# Altium PCB LPRAN.PcbDoc (part 1 of 3)
Units mil, origin at the board's own origin, x right, y up, seen from the top; angles counter-clockwise.
Board outline 3200 x 1800 mil, 4 copper layers (Component Side, Ground Plane, Power Plane, Solder Side), stack 58 mil thick; 140 components, 132 nets, 550 pads, 376 vias.
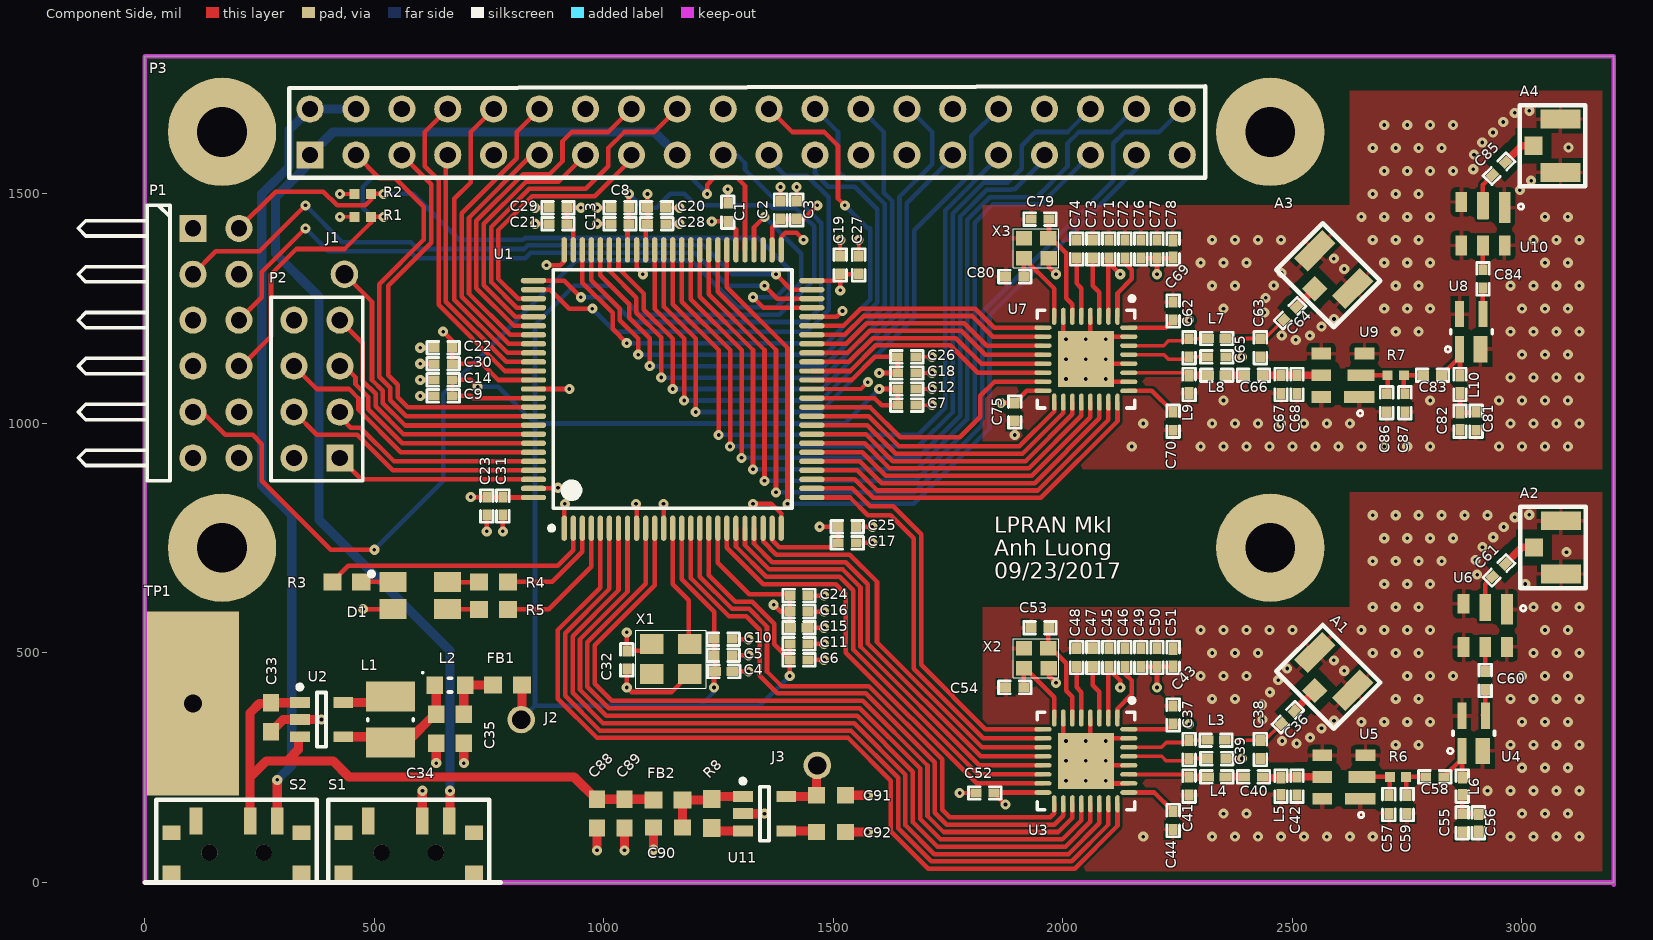
[diagram p0: Component Side view]
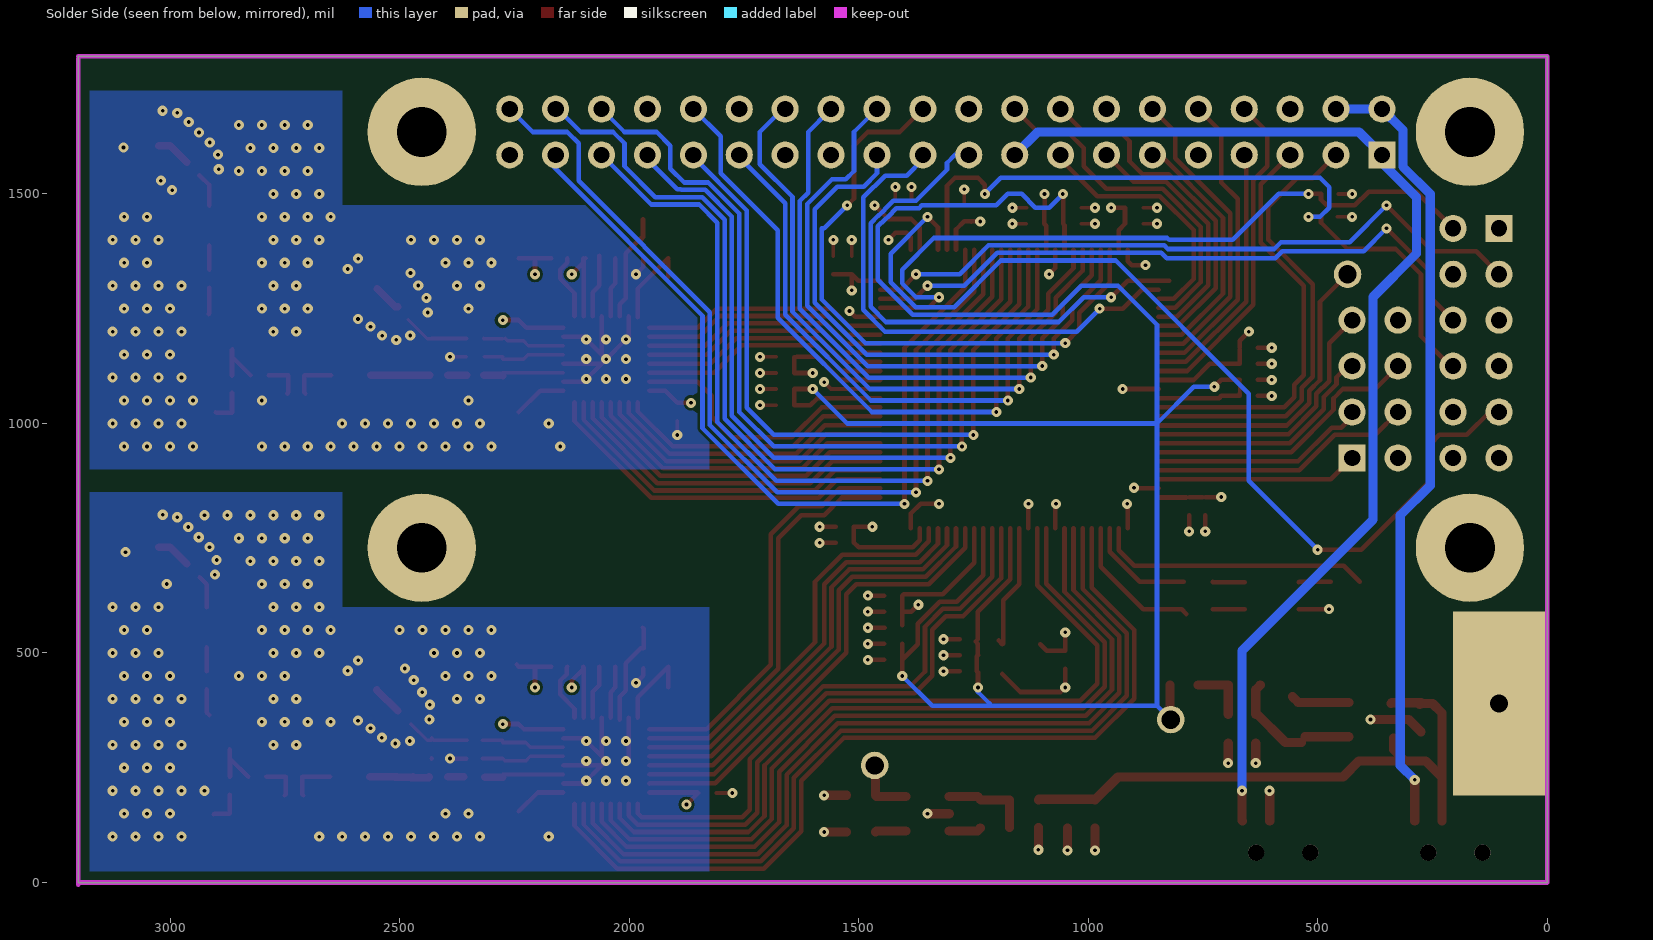
[diagram p1: Solder Side view, seen from below]
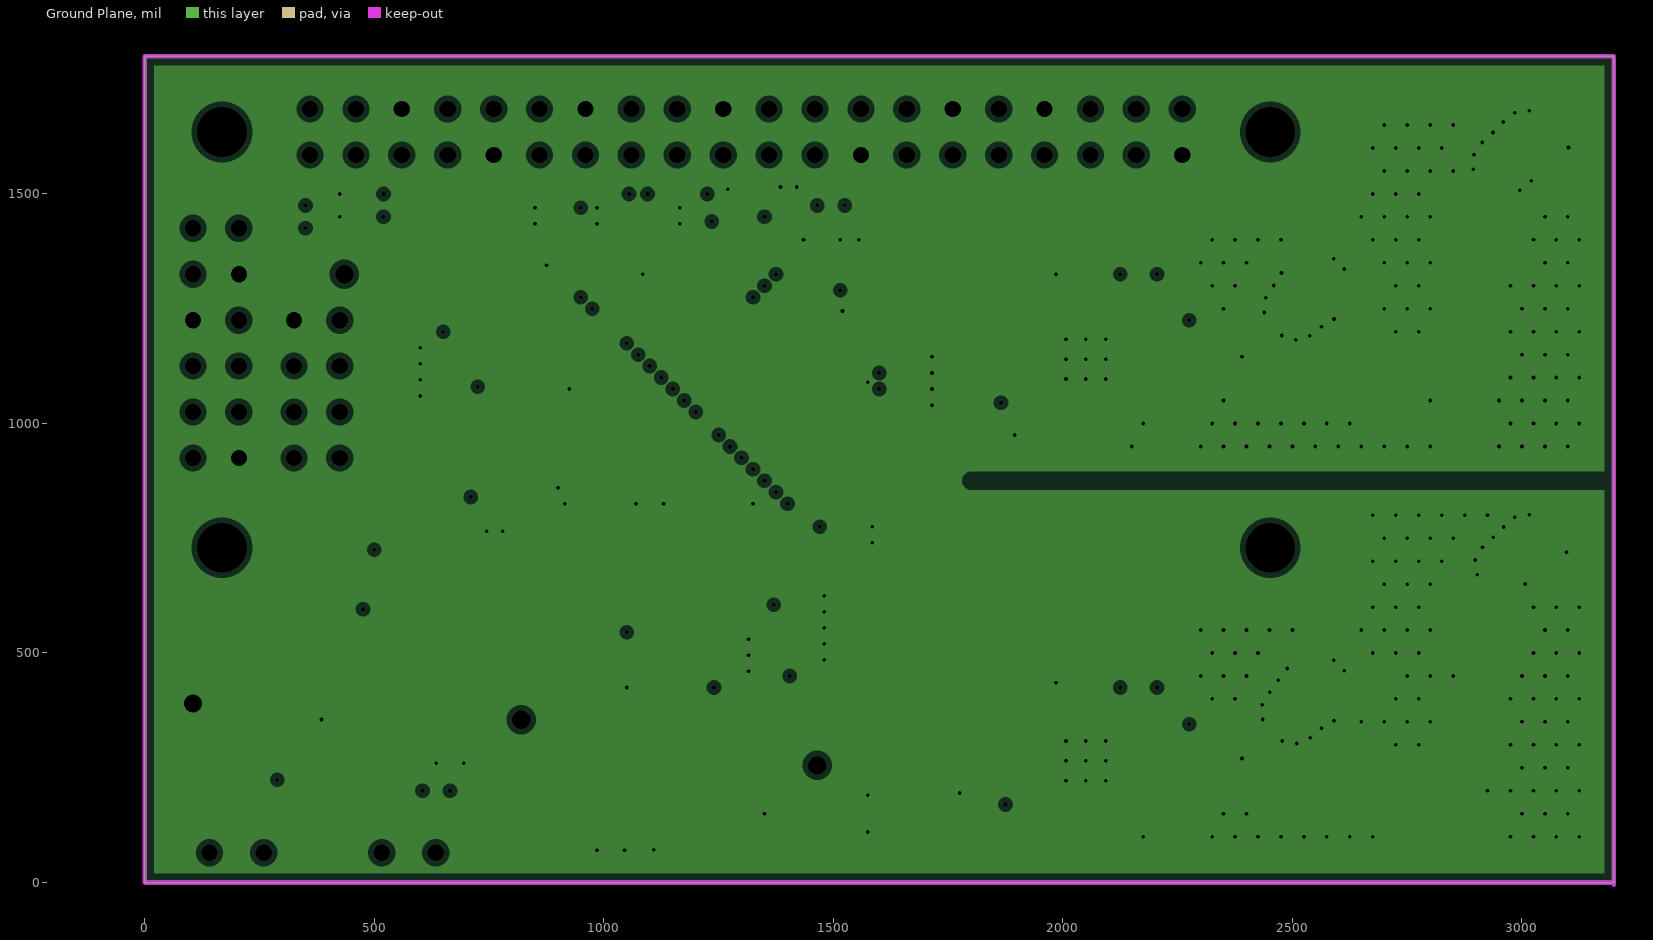
[diagram p2: Ground Plane, clearances drawn from the general rule]
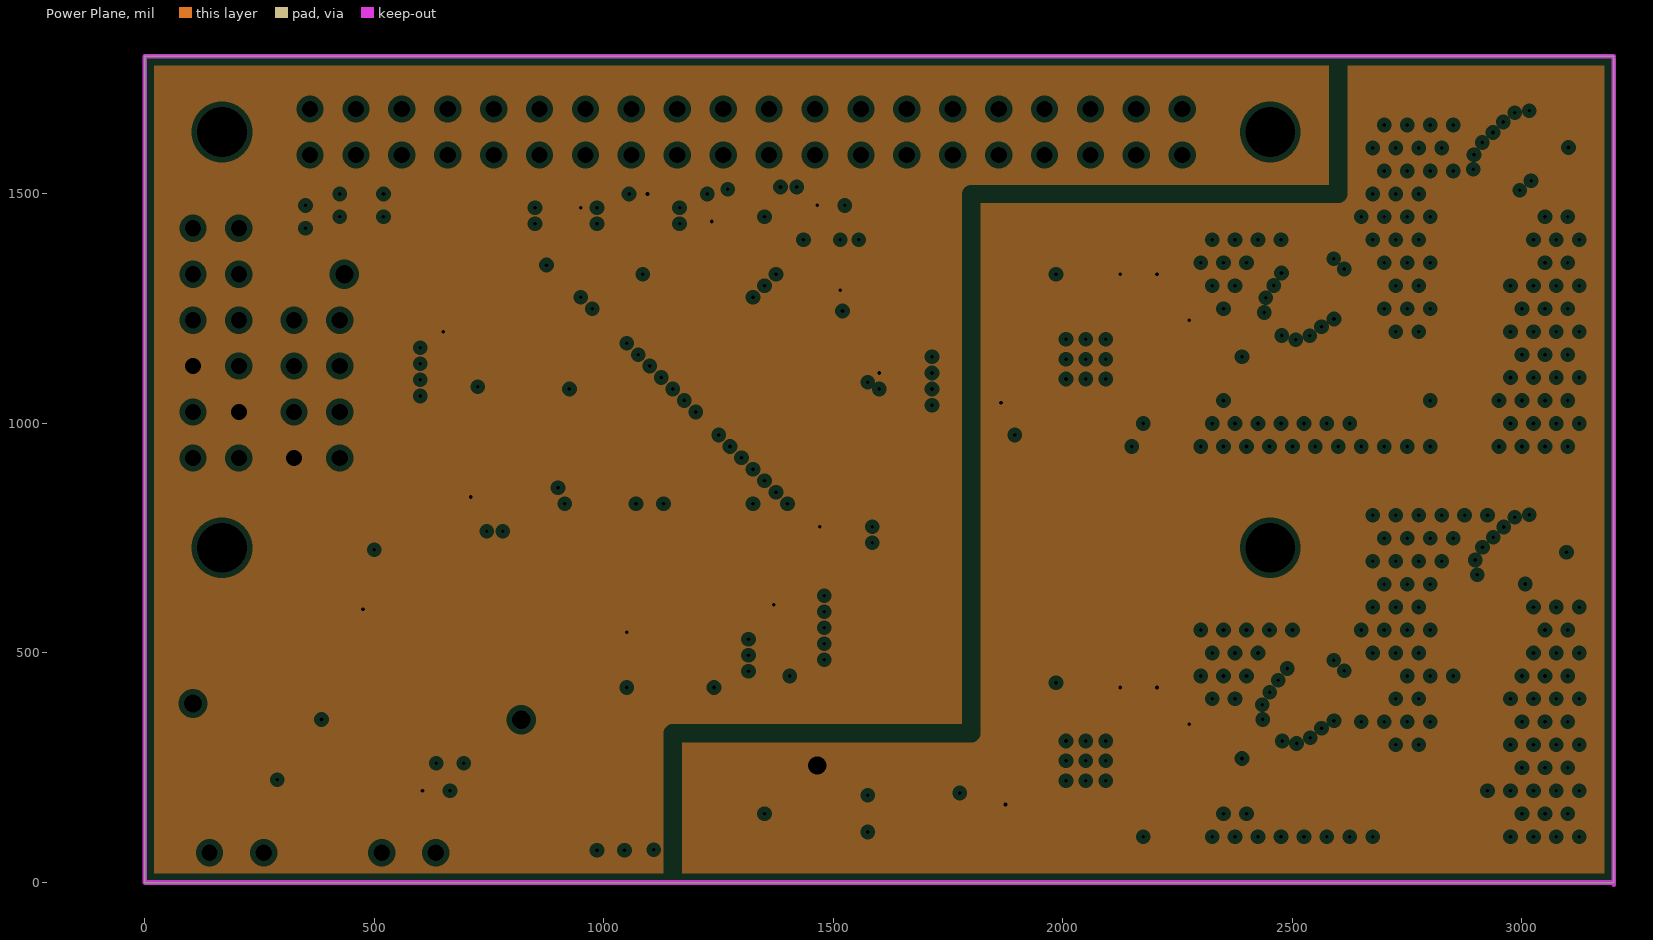
[diagram p3: Power Plane, clearances drawn from the general rule]
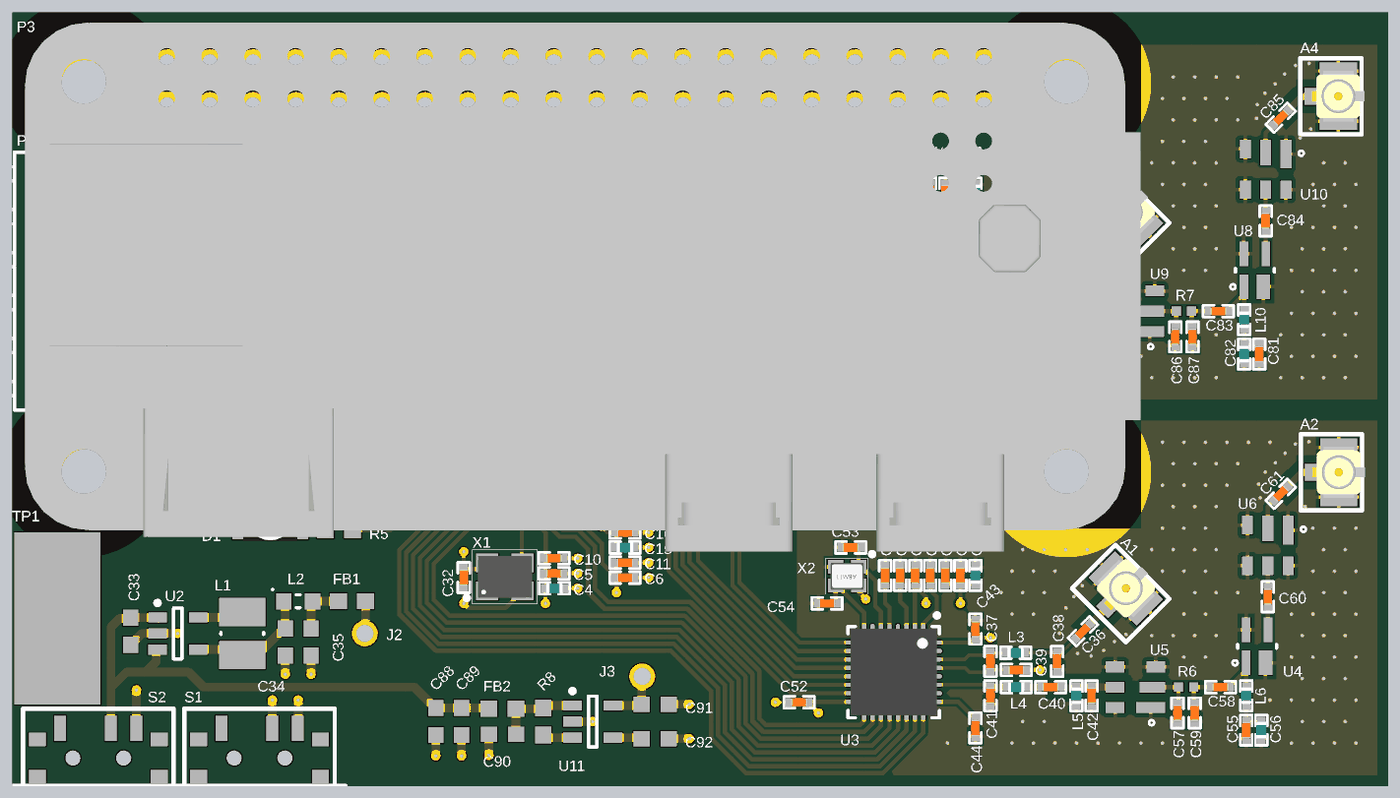
[diagram p5: 3D render of the assembled board from above, using the file's embedded part models]

## Layer stack, top to bottom
Top Solder: solder mask 0.4, Solder Resist, Dk 3.5
Component Side: signal copper 1.7
Dielectric 1: core 11.9, FR-4, Dk 4.5
Ground Plane: plane copper 1.4, net GND
Dielectric 3: prepreg 28, Core, Dk 4.5
Power Plane: plane copper 1.4, net VCC
Dielectric 4: core 11.9, FR-4, Dk 4.5
Solder Side: signal copper 1.7
Bottom Solder: solder mask 0.4, Solder Resist, Dk 3.5

## Board outline
0,0 3200,0 3200,1800 0,1800

## Design rules (kind name [scope] priority, off if disabled: settings)
Clearance [InNetClass('RF')] p1: gap=20 ignorepadtopadclearanceinfootprint=FALSE
Clearance "Clearance~Sunstone Circuits" [All] p2: gap=6 ignorepadtopadclearanceinfootprint=FALSE except(0: Arc-Hole Track-Hole SMDPad-Hole THPad-Hole Via-Hole Fill-Hole Poly-Hole Region-Hole Text-Hole) // Sunstone Circuits Minimum Clearance Rule (MLB~4&6 Layer Designs)
HoleSize "HoleSize~Sunstone Circuits" [All] p1: absolutevalues=TRUE maxlimit=251 minlimit=8 maxpercent=80.000 minpercent=20.000 // Sunstone Circuits Hole Size Rule (MLB~4&6 Layer Designs)
HoleSize Testpoint [All] p2: absolutevalues=TRUE maxlimit=100 minlimit=1 maxpercent=80.000 minpercent=20.000
HoleSize TestPointUsage [All] p3: absolutevalues=TRUE maxlimit=100 minlimit=1 maxpercent=80.000 minpercent=20.000
MinimumAnnularRing "MinimumAnnularRing~Sunstone Circuits" [All] p1: minimumring=7 // Sunstone Circuits Minimum Annular Ring (MLB~4&6 Layer Designs)
PlaneClearance "PlaneClearance~Sunstone Circuits" [All] p1: clearance=12 // Sunstone Circuits Power Plane Clearance Rule (MLB~4&6 Layer Designs)
PlaneConnect "PlaneConnect~Sunstone Circuits" [All] p1: planeconnectstyle=Relief reliefexpansion=10 reliefentries=4 reliefconductorwidth=8 reliefairgap=10 // Sunstone Circuits Power Plane Connect Rule (MLB~4&6 Layer Designs)
PolygonConnect [IsVia] p1: thpad.connectstyle=Direct thpad.reliefconductorwidth=10 thpad.reliefentries=4 thpad.polygonreliefangle="90 Angle" thpad.airgapwidth=10 smdpad.connectstyle=Relief smdpad.reliefconductorwidth=10 smdpad.reliefentries=4 smdpad.polygonreliefangle="90 Angle" smdpad.airgapwidth=10 via.connectstyle=Direct via.reliefconductorwidth=10 via.reliefentries=4 via.polygonreliefangle="90 Angle" via.airgapwidth=10
PolygonConnect "PolygonConnect~Sunstone Circuits" [All] p2: connectstyle=Relief reliefconductorwidth=8 reliefentries=4 polygonreliefangle="90 Angle" airgapwidth=10 // Sunstone Circuits Polygon Connect Style (MLB~4&6 Layer Designs)
RoomDefinition U_SX1257 [InComponentClass('U_SX1257')] p1: confinementstyle=ConfineIn formatcopy=TRUE lockcomponents=FALSE outline -2000,-3000 0,-3000 0,-2000 -2000,-2000
RoomDefinition U_SX1255 [InComponentClass('U_SX1255')] p2: confinementstyle=ConfineIn formatcopy=TRUE lockcomponents=FALSE outline -2000,-3000 0,-3000 0,-2000 -2000,-2000
RoomDefinition U_FPGA [InComponentClass('U_FPGA')] p3: confinementstyle=ConfineIn formatcopy=TRUE lockcomponents=FALSE outline -2000,-3000 0,-3000 0,-2000 -2000,-2000
RoomDefinition LPRAN [InComponentClass('LPRAN')] p4: confinementstyle=ConfineIn formatcopy=TRUE lockcomponents=FALSE outline -2000,-3000 0,-3000 0,-2000 -2000,-2000
RoutingVias "RoutingVias~Sunstone Circuits" [All] p1: holewidth=16 width=30 viastyle="Through Hole" minholewidth=8 minwidth=22 maxholewidth=20 maxwidth=40 // Sunstone Circuits Routing Vias Rule (MLB~4&6 Layer Designs)
ShortCircuit "ShortCircuit~Sunstone Circuits" [All] p1: allowed=FALSE // Sunstone Circuits Short Circuit Rule~Do Not Allow (MLB~4&6 Layer Designs)
SolderMaskExpansion "SolderMaskExpansion~Sunstone Circuits" [All] p1: expansion=3 // Sunstone Circuits Solder Mask Expansion Rule (MLB~4&6 Layer Designs)
ViasUnderSMD "ViasUnderSMD~Sunstone Circuits" [All] p1: allowed=FALSE // Sunstone Circuits Vias Under SMD~Do Not Allow (MLB~4&6 Layer Designs)
Width [InNetClass('RF')] p1: maxlimit=16.4 minlimit=16.4 preferedwidth=16.4 impedancedriven=TRUE minimp=50.000000 maximp=50.000000 favimp=50.000000
Width "Width~Sunstone Circuits" [All] p2: maxlimit=100 minlimit=6 preferedwidth=10 // Sunstone Circuits Minimum Width Rule (MLB~4&6 Layer Designs)
26 further rules are at their usual default settings.

## Classes and differential pairs
component class LPRAN: C32 C33 C34 C35 D1 FB1 J1 J2 L1 L2 P2 P3 R3 R4 R5 S1 S2 TP1 U2 X1
component class U_FPGA: C1 C2 C3 C4 C5 C6 C7 C8 C9 C10 C11 C12 C13 C14 C15 C16 C17 C18 C19 C20 C21 C22 C23 C24 C25 C26 C27 C28 C29 C30 C31 P1 R1 R2 U1
component class U_SX1255: A3 A4 C62 C63 C64 C65 C66 C67 C68 C69 C70 C71 C72 C73 C74 C75 C76 C77 C78 C79 C80 C81 C82 C83 C84 C85 C86 C87 C88 C89 C90 C91 C92 FB2 J3 L7 L8 L9 L10 R7 R8 U7 U8 U9 U10 U11 X3
component class U_SX1257: A1 A2 C36 C37 C38 C39 C40 C41 C42 C43 C44 C45 C46 C47 C48 C49 C50 C51 C52 C53 C54 C55 C56 C57 C58 C59 C60 C61 L3 L4 L5 L6 R6 U3 U4 U5 U6 X2
net class RF: HF_RX LF_RX NetA1_1 NetA2_1 NetA3_1 NetA4_1

## Components (designator, comment, footprint, x,y, rotation, side; value= is the part's Value field where it differs from the comment)
A1 "U.FL-R-SMT(01)" U.FL-R-SMT-1 2590,460 r315 top
A2 "U.FL-R-SMT(01)" U.FL-R-SMT-1 3085,730 r270 top
A3 "U.FL-R-SMT(01)" U.FL-R-SMT-1 2590,1335 r315 top
A4 "U.FL-R-SMT(01)" U.FL-R-SMT-1 3084.06,1605 r270 top
C1 "GRM155R71C104KA88D" CAPC1005X04L 1270,1460 r270 top
C2 "GRM155R71E103KA01D" CAPC1005X04L 1385,1465 r270 top
C3 "GRM155R71C104KA88D" CAPC1005X04L 1420,1465 r270 top
C4 "GRM155R60J106ME15D" INDC1005X04L 1260.98,460 r180 top
C5 "GRM155R71C104KA88D" CAPC1005X04L 1260,495 r180 top
C6 "GRM155R71C104KA88D" CAPC1005X04L 1425,485 r180 top
C7 "GRM155R71C104KA88D" CAPC1005X04L 1660,1040 r180 top
C8 "GRM155R71C104KA88D" CAPC1005X04L 1035,1470 r0 top
C9 "GRM155R71C104KA88D" CAPC1005X04L 650,1060 r0 top
C10 "GRM155R71E103KA01D" CAPC1005X04L 1260,530 r180 top
C11 "GRM155R71E103KA01D" CAPC1005X04L 1425,520 r180 top
C12 "GRM155R71E103KA01D" CAPC1005X04L 1660,1075 r180 top
C13 "GRM155R71E103KA01D" CAPC1005X04L 1035,1435 r0 top
C14 "GRM155R71E103KA01D" CAPC1005X04L 650,1095 r0 top
C15 "GRM155R60J106ME15D" INDC1005X04L 1425,555 r180 top
C16 "GRM155R71C104KA88D" CAPC1005X04L 1425,590 r180 top
C17 "GRM155R71C104KA88D" CAPC1005X04L 1530,740 r180 top
C18 "GRM155R71C104KA88D" CAPC1005X04L 1660,1110 r180 top
C19 "GRM155R71C104KA88D" CAPC1005X04L 1515,1345 r270 top
C20 "GRM155R71C104KA88D" CAPC1005X04L 1114.69,1470 r180 top
C21 "GRM155R71C104KA88D" CAPC1005X04L 900,1435 r0 top
C22 "GRM155R71C104KA88D" CAPC1005X04L 650,1165 r0 top
C23 "GRM155R71C104KA88D" CAPC1005X04L 745,820 r90 top
C24 "GRM155R71E103KA01D" CAPC1005X04L 1425,625 r180 top
C25 "GRM155R71E103KA01D" CAPC1005X04L 1530,775 r180 top
C26 "GRM155R71E103KA01D" CAPC1005X04L 1659.69,1145 r180 top
C27 "GRM155R71E103KA01D" CAPC1005X04L 1555,1345 r270 top
C28 "GRM155R71E103KA01D" CAPC1005X04L 1115,1435 r180 top
C29 "GRM155R71E103KA01D" CAPC1005X04L 900,1470 r0 top
C30 "GRM155R71E103KA01D" CAPC1005X04L 650.31,1130 r0 top
C31 "GRM155R71E103KA01D" CAPC1005X04L 780,820 r90 top
C32 "GRM155R71E103KA01D" CAPC1005X04L 1050,485 r90 top
C33 "GRM188R60J475KE19D" "CAPC1608X08N (0603)" 275,360 r90 top
C34 "GRM188C81C106MA73D" "CAPC1608X08N (0603)" 635,335 r90 top
C35 "GRM188R71C334KA01D" "CAPC1608X08N (0603)" 695,335 r90 top
C36 "GRM1555C1H100FA01D" CAPC1005X04L 2490,360 r45 top
C37 "GRM1555C1H3R3CA01D" CAPC1005X04L 2275,290 r90 top
C38 "GRM1555C1H3R3CA01D" CAPC1005X04L 2430,290 r90 top
C39 "GRM1555C1H330JA01D" CAPC1005X04L 2335,270 r0 top
C40 "GRM1555C1H100FA01D" CAPC1005X04L 2415,230 r0 top
C41 "GRM1555C1H2R7BA01D" CAPC1005X04L 2275,210 r90 top
C42 "GRM1555C1H5R6CA01D" CAPC1005X04L 2510,210 r90 top
C43 "GRM155R60J105KE19D" CAPC1005X04L 2240,365 r270 top
C44 "GRM155R71C104KA88D" CAPC1005X04L 2240,135 r90 top
C45 "GRM155R60J105KE19D" CAPC1005X04L 2100,490 r270 top
C46 "GRM155R71E103KA01D" CAPC1005X04L 2135,490 r270 top
C47 "GRM155R71C104KA88D" CAPC1005X04L 2065,490 r270 top
C48 "GRM155R71C104KA88D" CAPC1005X04L 2030,490 r270 top
C49 "GRM155R71C104KA88D" CAPC1005X04L 2170,490 r270 top
C50 "GRM155R60J105KE19D" CAPC1005X04L 2205,490 r270 top
C51 "GRM155R60J106ME15D" INDC1005X04L 2240,490 r270 top
C52 "GRM155R60J105KE19D" CAPC1005X04L 1830,195 r0 top
C53 "GRM1555C1H8R2CA01D" CAPC1005X04L 1950,555 r0 top
C54 "GRM1555C1H8R2CA01D" CAPC1005X04L 1895,425 r0 top
C55 "GRM1555C1H560JA01D" CAPC1005X04L 2870,130 r90 top
C56 "GRM155R60J106ME15D" INDC1005X04L 2905,130 r90 top
C57 "C_DNP" CAPC1005X04L 2710,170 r90 top value=DNP
C58 "GRM1555C1H560JA01D" CAPC1005X04L 2810,230 r0 top
C59 "C_DNP" CAPC1005X04L 2750,170 r90 top value=DNP
C60 "GRM1555C1H560JA01D" CAPC1005X04L 2920,440.31 r90 top
C61 "GRM1555C1H560JA01D" CAPC1005X04L 2950,680 r45 top
C62 "C_DNP" CAPC1005X04L 2275,1165 r90 top value=DNP
C63 "C_DNP" CAPC1005X04L 2430,1165 r90 top value=DNP
C64 "GRM1555C1H330JA01D" CAPC1005X04L 2495,1240 r45 top
C65 "GRM1555C1H270JA01J" CAPC1005X04L 2335,1145 r0 top
C66 "C_TBD" CAPC1005X04L 2415,1105 r0 top value=TBD
C67 "C_DNP" CAPC1005X04L 2475,1085 r90 top value=DNP
C68 "C_DNP" CAPC1005X04L 2510,1085 r90 top value=DNP
C69 "GRM155R60J105KE19D" CAPC1005X04L 2240,1245 r270 top
C70 "GRM155R71C104KA88D" CAPC1005X04L 2240,1005 r90 top
C71 "GRM155R60J105KE19D" CAPC1005X04L 2100,1380 r270 top
C72 "GRM155R71E103KA01D" CAPC1005X04L 2135,1380 r270 top
C73 "GRM155R71C104KA88D" CAPC1005X04L 2065,1380 r270 top
C74 "GRM155R71C104KA88D" CAPC1005X04L 2030,1380 r270 top
C75 "GRM155R60J105KE19D" CAPC1005X04L 1895,1025 r90 top
C76 "GRM155R71C104KA88D" CAPC1005X04L 2170,1380 r270 top
C77 "GRM155R60J105KE19D" CAPC1005X04L 2205,1380 r270 top
C78 "GRM155R60J106ME15D" INDC1005X04L 2240,1380 r270 top
C79 "GRM1555C1H8R2CA01D" CAPC1005X04L 1950,1445 r0 top
C80 "GRM1555C1H8R2CA01D" CAPC1005X04L 1895,1320 r0 top
C81 "GRM1555C1H560JA01D" CAPC1005X04L 2900,1005 r90 top
C82 "GRM155R60J106ME15D" INDC1005X04L 2865,1005 r90 top
C83 "C_TBD" CAPC1005X04L 2805,1105 r0 top value=TBD
C84 "C_TBD" CAPC1005X04L 2915,1315 r90 top value=TBD
C85 "C_TBD" CAPC1005X04L 2950,1555 r45 top value=TBD
C86 "C_DNP" CAPC1005X04L 2705,1045 r90 top value=DNP
C87 "C_DNP" CAPC1005X04L 2745,1045 r90 top value=DNP
C88 "GRM188C81C106MA73D" "CAPC1608X08N (0603)" 985,150 r90 top
C89 "GRM188R61A105KA61D" "CAPC1608X08N (0603)" 1045,150 r90 top
C90 "GRM188R60J225KE19D" "CAPC1608X08N (0603)" 1140,120 r0 top
C91 "GRM188R61A105KA61D" "CAPC1608X08N (0603)" 1495,190 r180 top
C92 "GRM1885C1H102JA01D" "CAPC1608X08N (0603)" 1495,110 r180 top
D1 "CLV1A-FKB-CJ1M1F1BB7R4S3" "CREE LV1" 600,625 r0 top
FB1 "MMZ1608R300A" "RESC1608X06N (0603)" 790,430 r180 top
FB2 "BLM18BD221SN1D" "RESC1608X06N (0603)" 1140,180 r0 top
J1 "5004" TP 435,1325 r0 top
J2 "5004" TP 820,355 r0 top
J3 "5004" TP 1465,255 r0 top
L1 "LQH32CN2R2M33L" INDC3225X22N 535,355 r270 top
L2 "LQG18HNR10J00D" INDC1608X08N 665,430 r0 top
L3 "LQG15HS10NJ02D" INDC1005X04L 2333.7,310 r0 top
L4 "LQG15HS15NJ02D" INDC1005X04L 2335,230 r0 top
L5 "LQG15HN12NJ02D" INDC1005X04L 2475,210 r90 top
L6 "LQG15HSR10J02D" INDC1005X04L 2870,210 r270 top
L7 "L_TBD" INDC1005X04L 2335,1185 r0 top
L8 "LQG15HS39NJ02D" INDC1005X04L 2335,1105 r0 top
L9 "LQG15HS82NJ02D" INDC1005X04L 2275,1085 r90 top
L10 "LQG15HSR10J02D" INDC1005X04L 2865,1085 r270 top
P1 "Header 6X2H" HDR2X6H 105,1425 r270 top
P2 "Header 4X2" HDR2X4 425,925 r90 top
P3 "Raspbery Pi Zero Mate" "Raspberry Pi Zero" 1310,1635 r270 top locked
R1 "MCR01MRTF1001" RESC1005X04N 475,1450 r0 top
R2 "MCR01MRTF1001" RESC1005X04N 475,1500 r0 top
R3 "MCR03ERTJ331" "RESC1608X06N (0603)" 440,655 r0 top
R4 "MCR03ERTJ331" "RESC1608X06N (0603)" 760,655 r0 top
R5 "MCR03ERTJ331" "RESC1608X06N (0603)" 760,595 r0 top
R6 "PMR01ZZPJ000" RESC1005X04N 2730,230 r0 top
R7 "PMR01ZZPJ000" RESC1005X04N 2725,1105 r0 top
R8 "MCR03ERTF1002" "RESC1608X06N (0603)" 1235,150 r90 top value=10k
S1 "MA12R" MA12R/TR 575,65 r90 top
S2 "MA12R" MA12R/TR 200,65 r90 top
TP1 "CLIP_ON_TP" CLIP_ON_TP 105,390 r180 top
U1 "AGL250V2-VQ100" TSQFP50P1600X1600X120-100N 1150,1075 r90 top
U2 "LM3671MF-1.5/NOPB" SOT95P280X145-5N 385,355 r0 top
U3 "SX1257IWLTRT" QFN50P500X500X80_HS-33N 2050,265 r270 top
U4 "SPF5043Z" SOT-343 2895,325 r90 top
U5 "SAW Filter" DCC6C_3.0x3.0mm 2612.24,230 r180 top
U6 "SAW Filter" DCC6C_3.0x3.0mm 2920,560 r270 top
U7 "SX1257IWLTRT" QFN50P500X500X80_HS-33N 2050,1140 r270 top
U8 "SPF5043Z" SOT-343 2890,1200 r90 top
U9 "SAW Filter" DCC6C_3.0x3.0mm 2610,1105 r180 top
U10 "SAW Filter" DCC6C_3.0x3.0mm 2915,1435 r270 top
U11 "FAN2500S30X" SOT95P280X145-5N 1350,150 r0 top
X1 "ASE-32.000MHZ-L-C-T" 3.2x2.5x1.2mmXTAL 1145.71,486.72 r0 top
X2 "ABM11-36.000MHZ-D2X-T3" 2.0x1.6x0.59mmXTAL 1989.8,529.68 r180 top
X3 "ABM11-36.000MHZ-D2X-T3" 2.0x1.6x0.59mmXTAL 1989.8,1422.99 r180 top

## Footprints (in the part's own frame and the unit in brackets; to place one, negate y for a bottom-side part, rotate by r counter-clockwise, add the part's x,y. Pads: shape width x height; smd on the part's side, far side on the other; paste and mask are expansions set on the pad)
2.0x1.6x0.59mmXTAL [mm]
  rect 0.9x0.8 smd: 1(0.55,0.5) 2(1.9,0.5) 3(1.9,1.6) 4(0.525,1.6)
  round 0.5 on Top Overlay: 5(-0.254,-0.254)
  silkscreen extent -0.03,-0.03 2.47,2.12, body extent 0.22,0.25 2.22,1.85, height 0.59
3.2x2.5x1.2mmXTAL [mm]
  rect 1.3x1.1 smd: 1(-1.05,-0.825) 2(1.05,-0.825) 3(1.05,0.825) 4(-1.05,0.825)
  round 0.5 on Top Overlay: 5(-2.25,-1.25)
  silkscreen extent -1.93,-1.6 1.93,1.6, body extent -1.6,-1.25 1.6,1.25, height 0.91
CAPC1005X04L [mm]
  rect 0.6x0.5 smd: 1(-0.5,0) 2(0.5,0)
  silkscreen extent -0.9,-0.35 0.9,0.35, body extent -0.51,-0.25 0.51,0.25, height 0.5
"CAPC1608X08N (0603)" [mm] "Chip Capacitor, 2-Leads, Body 1.60x0.80mm, IPC Medium Density"
  rect 0.95x0.9 smd: 1(-0.8,0) 2(0.8,0)
  body extent -0.85,-0.45 0.85,0.45, height 0.8
CLIP_ON_TP [mil]
  rect 200x400 smd: 1(0,0)
  rect 200x400 smd far side: 1(0,0)
"CREE LV1" [mm]
  rect 1.5x1.1 smd: 1(-1.5,0.75) 2(-1.5,-0.75) 3(1.5,-0.75) 4(1.5,0.75)
  silkscreen extent -2.82,1.08 -2.57,1.32, body extent -1.75,-1.4 1.75,1.4, height 1.9
DCC6C_3.0x3.0mm [mm] "DCC6C footprint, 3.0x3.0mm"
  rrect5% 1.7x0.65 smd mask+0.05: 1(-0.9,1.2)
  rrect5% 1.5x0.65 smd mask+0.05: 2(-1,0)
  rrect5% 1.1x0.65 smd mask+0.05: 3(-1.2,-1.2) 4(1.2,-1.2) 5(1.2,0) 6(1.2,1.2)
  silkscreen extent -1.1,1.95 -0.8,2.25, body extent -1.5,-1.5 1.5,1.5, height 1
HDR2X4 [mm] "Connector; Header; 4x2 Position"
  rect 1.5x1.5 hole 0.9: 1(0,0)
  round 1.5 hole 0.9: 2(0,2.54) 3(2.54,0) 4(2.54,2.54) 5(5.08,0) 6(5.08,2.54) 7(7.62,0) 8(7.62,2.54)
  silkscreen extent -1.27,-1.27 8.89,3.81
HDR2X6H [mm] "Connector; Header; 6x2 Position; Right Angle"
  rect 1.5x1.5 hole 0.9: 1(0,0)
  round 1.5 hole 0.9: 2(0,2.54) 3(2.54,0) 4(2.54,2.54) 5(5.08,0) 6(5.08,2.54) 7(7.62,0) 8(7.62,2.54) 9(10.16,0) 10(10.16,2.54) 11(12.7,0) 12(12.7,2.54)
  silkscreen extent -1.27,-6.35 13.97,-1.27
INDC1005X04L [mm]
  rect 0.65x0.5 smd: 1(-0.475,0) 2(0.475,0)
  silkscreen extent -0.9,-0.35 0.9,0.35, body extent -0.5,-0.3 0.5,0.3, height 0.5
INDC1608X08N [mm] "Chip Inductor, 2-Leads, Body 1.60x0.80mm, IPC Medium Density"
  rect 0.91x0.96 smd: 1(-0.845,0) 2(0.845,0)
  silkscreen extent -1.56,-0.38 0.1,0.74, body extent -0.88,-0.48 0.87,0.47, height 0.8
INDC3225X22N [mm] "Chip Inductor, 2-Leads, Body 3.20x2.50mm, IPC Medium Density"
  rect 1.67x2.72 smd: 1(-1.27,0) 2(1.27,0)
  silkscreen extent -0.05,-1.26 0.05,1.26, body extent -1.75,-1.35 1.75,1.35, height 2.2
MA12R/TR [mm]
  rect 1.5x0.7 smd: 1(1.75,-2.25) 2(1.75,2.25) 3(1.75,-0.75)
  rect 0.8x1 smd: 4(-1.1,3.6) 5(1.1,3.6) 6(-1.1,-3.6) 7(1.1,-3.6)
  round 0.9 hole 0.9 unplated: 8(0,1.5) 9(0,-1.5)
  silkscreen extent -1.65,-5.08 2.92,5.08
QFN50P500X500X80_HS-33N [mm] "QFN, 32-Leads, Body 5.00x5.00mm, Pitch 0.50mm, Thermal Pad 3.10x3.10mm, IPC Medium Density"
  oval 0.95x0.25 smd: 1(-2.375,1.75) 2(-2.375,1.25) 3(-2.375,0.75) 4(-2.375,0.25) 5(-2.375,-0.25) 6(-2.375,-0.75) 7(-2.375,-1.25) 8(-2.375,-1.75) 17(2.375,-1.75) 18(2.375,-1.25) 19(2.375,-0.75) 20(2.375,-0.25) 21(2.375,0.25) 22(2.375,0.75) 23(2.375,1.25) 24(2.375,1.75)
  oval 0.25x0.95 smd: 9(-1.75,-2.375) 10(-1.25,-2.375) 11(-0.75,-2.375) 12(-0.25,-2.375) 13(0.25,-2.375) 14(0.75,-2.375) 15(1.25,-2.375) 16(1.75,-2.375) 25(1.75,2.375) 26(1.25,2.375) 27(0.75,2.375) 28(0.25,2.375) 29(-0.25,2.375) 30(-0.75,2.375) 31(-1.25,2.375) 32(-1.75,2.375)
  rect 3.1x3.1 smd: 33(0,0)
  silkscreen extent -3.47,-2.7 2.7,2.7, body extent -2.55,-2.55 2.55,2.55, height 0.8
"Raspberry Pi Zero" [mm] "Raspberry Pi Zero Header and Layout"
  round 6 hole 2.75 unplated mask+2: 0(0,29) 0(0,-29) 0(23,-29) 0(23,29)
  rect 1.5x1.5 hole 0.9: 1(1.27,-24.13)
  round 1.5 hole 0.9: 2(-1.27,-24.13) 3(1.27,-21.59) 4(-1.27,-21.59) 5(1.27,-19.05) 6(-1.27,-19.05) 7(1.27,-16.51) 8(-1.27,-16.51) 9(1.27,-13.97) 10(-1.27,-13.97) 11(1.27,-11.43) 12(-1.27,-11.43) 13(1.27,-8.89) 14(-1.27,-8.89) 15(1.27,-6.35) 16(-1.27,-6.35) 17(1.27,-3.81) 18(-1.27,-3.81) 19(1.27,-1.27) 20(-1.27,-1.27) 21(1.27,1.27) 22(-1.27,1.27) 23(1.27,3.81) 24(-1.27,3.81) 25(1.27,6.35) 26(-1.27,6.35) 27(1.27,8.89) 28(-1.27,8.89) 29(1.27,11.43) 30(-1.27,11.43) 31(1.27,13.97) 32(-1.27,13.97) 33(1.27,16.51) 34(-1.27,16.51) 35(1.27,19.05) 36(-1.27,19.05) 37(1.27,21.59) 38(-1.27,21.59) 39(1.27,24.13) 40(-1.27,24.13)
  silkscreen extent -2.54,-25.27 2.54,25.4, body extent -3.6,-32.53 27.65,33.37, height 10.64
RESC1005X04N [mm] "Chip Resistor, 2-Leads, Body 1.00x0.50mm, IPC Medium Density"
  rect 0.55x0.55 smd: 1(-0.45,0) 2(0.45,0)
  body extent -0.53,-0.27 0.53,0.28, height 0.4
"RESC1608X06N (0603)" [mm] "Chip Resistor, 2-Leads, Body 1.60x0.80mm, IPC Medium Density"
  rect 1x0.95 smd: 1(-0.8,0) 2(0.8,0)
  body extent -0.85,-0.45 0.85,0.45, height 0.55
SOT95P280X145-5N [mm] "SOT23, 5-Leads, Body 2.90x2.80mm, Pitch 0.95mm, IPC Medium Density"
  rect 1.1x0.6 smd: 1(-1.2,0.95) 2(-1.2,0) 3(-1.2,-0.95) 4(1.2,-0.95) 5(1.2,0.95)
  silkscreen extent -1.32,-1.5 0.25,1.92, body extent -0.85,-1.5 0.85,1.5, height 1.45
SOT-343 [mm] "SOT343, 4-Leads, Body 2x1.3 mm, Pitch 1.3mm, Lead Span 2.1mm"
  rect 1.45x0.5 smd mask+0.05: 1(-0.975,0.65) 3(0.975,-0.65) 4(0.975,0.65)
  rect 1.45x0.8 smd mask+0.05: 2(-0.975,-0.5)
  silkscreen extent -1.12,-1.15 0.1,1.45, body extent -0.7,-1.1 0.7,1.1, height 1
TP [mil]
  round 60 hole 40.16: 1(0,0)
TSQFP50P1600X1600X120-100N [mm] "TSQFP, 100-Leads, Body 14.00x14.00mm, Pitch 0.50mm, IPC Medium Density"
  oval 1.4x0.3 smd: 1(-7.7,6) 2(-7.7,5.5) 3(-7.7,5) 4(-7.7,4.5) 5(-7.7,4) 6(-7.7,3.5) 7(-7.7,3) 8(-7.7,2.5) 9(-7.7,2) 10(-7.7,1.5) 11(-7.7,1) 12(-7.7,0.5) 13(-7.7,0) 14(-7.7,-0.5) 15(-7.7,-1) 16(-7.7,-1.5) 17(-7.7,-2) 18(-7.7,-2.5) 19(-7.7,-3) 20(-7.7,-3.5) 21(-7.7,-4) 22(-7.7,-4.5) 23(-7.7,-5) 24(-7.7,-5.5) 25(-7.7,-6) 51(7.7,-6) 52(7.7,-5.5) 53(7.7,-5) 54(7.7,-4.5) 55(7.7,-4) 56(7.7,-3.5) 57(7.7,-3) 58(7.7,-2.5) 59(7.7,-2) 60(7.7,-1.5) 61(7.7,-1) 62(7.7,-0.5) 63(7.7,0) 64(7.7,0.5) 65(7.7,1) 66(7.7,1.5) 67(7.7,2) 68(7.7,2.5) 69(7.7,3) 70(7.7,3.5) 71(7.7,4) 72(7.7,4.5) 73(7.7,5) 74(7.7,5.5) 75(7.7,6)
  oval 0.3x1.4 smd: 26(-6,-7.7) 27(-5.5,-7.7) 28(-5,-7.7) 29(-4.5,-7.7) 30(-4,-7.7) 31(-3.5,-7.7) 32(-3,-7.7) 33(-2.5,-7.7) 34(-2,-7.7) 35(-1.5,-7.7) 36(-1,-7.7) 37(-0.5,-7.7) 38(0,-7.7) 39(0.5,-7.7) 40(1,-7.7) 41(1.5,-7.7) 42(2,-7.7) 43(2.5,-7.7) 44(3,-7.7) 45(3.5,-7.7) 46(4,-7.7) 47(4.5,-7.7) 48(5,-7.7) 49(5.5,-7.7) 50(6,-7.7) 76(6,7.7) 77(5.5,7.7) 78(5,7.7) 79(4.5,7.7) 80(4,7.7) 81(3.5,7.7) 82(3,7.7) 83(2.5,7.7) 84(2,7.7) 85(1.5,7.7) 86(1,7.7) 87(0.5,7.7) 88(0,7.7) 89(-0.5,7.7) 90(-1,7.7) 91(-1.5,7.7) 92(-2,7.7) 93(-2.5,7.7) 94(-3,7.7) 95(-3.5,7.7) 96(-4,7.7) 97(-4.5,7.7) 98(-5,7.7) 99(-5.5,7.7) 100(-6,7.7)
  silkscreen extent -7.82,-6.6 6.6,6.82, body extent -7,-7 7,7, height 1.2
U.FL-R-SMT-1 [mm] "U.FL-R-SMT-1"
  rect 1x1 smd: 1(0,-1.5)
  rect 1.05x2.2 smd: 2(-1.475,0) 3(1.475,0)
  silkscreen extent -2.25,-2.25 2.25,1.37, body extent -1.5,-1.55 1.5,1.55, height 1.26

## Part data
A1 A2 A3 A4: "CONN UMC JACK STR 50 OHM SMD", Dielectric Material="Liquid Crystal Polymer (LCP)", Frequency - Max=6GHz, Housing Color=Silver, Manufacturer="Hirose Electric Co Ltd", Operating Temperature="-40°C ~ 90°C", Voltage Rating=-, Body Finish=Silver, Body Material="Phosphor Bronze", Cable Group=-, Category="Connectors, Interconnects", Center Contact Material="Phosphor Bronze", Center Contact Plating=Gold, ComponentLink1Description=http://www.hirose.co.jp/cataloge_hp/e32119372.pdf, ComponentLink1URL=http://www.hirose.co.jp/cataloge_hp/e32119372.pdf, Connector Style="Ultra Miniature Coaxial", Connector Type="Jack, Male Pin", Contact Termination=Solder, Fastening Type=Snap-On, Features=-, Impedance="50 Ohm", Ingress Protection=-, Manufacturer Part Number=U.FL-R-SMT(01), Mounting Type="Surface Mount", Packaging=Bulk, Pricing 1="1=1.28, 10=1.122, 25=1.056, 50=1.012, 100=0.968, 250=0.88, 500=0.792, 1000=0.704, 2500=0.638 (USD)", RoHS="RoHS Compliant", Shield Termination=Solder, Stock 1=22286, Supplier 1=Digi-Key
C1 C3 C5 C6 C7 C8 C9 C16 C17 C18 C19 C20 C21 C22 C23 C44 C47 C48 C49 C70 C73 C74 C76: "CAP CER 0.1UF 16V X7R 0402", Manufacturer="Murata Electronics North America", Operating Temperature="-55°C ~ 125°C", Package / Case="0402 (1005 Metric)", Ratings=-, Supplier Part Number 1=490-3261-1-ND, Temperature Coefficient=X7R, Tolerance=±10%, Voltage - Rated=16V, Applications="General Purpose", Category=Capacitors, ComponentLink1Description=http://www.murata.com/~/media/webrenewal/support/library/catalog/products/capacitor/mlcc/c02e.pdf, ComponentLink1URL=http://www.murata.com/~/media/webrenewal/support/library/catalog/products/capacitor/mlcc/c02e.pdf, Features=-, Height - Seated (Max)=-, Lead Spacing=-, Lead Style=-, Manufacturer Part Number=GRM155R71C104KA88D, Mounting Type="Surface Mount, MLCC", Packaging="Cut Tape (CT)", Part Status=Active, Pricing 1="1=0.1, 10=0.014, 100=0.0062, 500=0.00442, 1000=0.00348, 2500=0.00316, 5000=0.00291 (USD)", RoHS="RoHS Compliant", Size / Dimension="0.039\" L x 0.020\" W (1.00mm x 0.50mm)", Stock 1=38255872, Supplier 1=Digi-Key, Thickness (Max)="0.022\" (0.55mm)"
C2 C10 C11 C12 C13 C14 C24 C25 C26 C27 C28 C29 C30 C31 C32 C46 C72: "CAP CER 10000PF 25V X7R 0402", Manufacturer="Murata Electronics North America", Operating Temperature="-55°C ~ 125°C", Package / Case="0402 (1005 Metric)", Ratings=-, Supplier Part Number 1=490-1312-1-ND, Temperature Coefficient=X7R, Tolerance=±10%, Voltage - Rated=25V, Applications="General Purpose", Category=Capacitors, ComponentLink1Description=http://www.murata.com/~/media/webrenewal/support/library/catalog/products/capacitor/mlcc/c02e.pdf, ComponentLink1URL=http://www.murata.com/~/media/webrenewal/support/library/catalog/products/capacitor/mlcc/c02e.pdf, Features=-, Height - Seated (Max)=-, Lead Spacing=-, Lead Style=-, Manufacturer Part Number=GRM155R71E103KA01D, Mounting Type="Surface Mount, MLCC", Packaging="Cut Tape (CT)", Part Status=Active, Pricing 1="1=0.1, 10=0.013, 100=0.0056, 500=0.004, 1000=0.00315, 2500=0.00286, 5000=0.00263 (USD)", RoHS="RoHS Compliant", Size / Dimension="0.039\" L x 0.020\" W (1.00mm x 0.50mm)", Stock 1=8083248, Supplier 1=Digi-Key, Thickness (Max)="0.022\" (0.55mm)"
C4 C15 C51 C56 C78 C82: "CAP CER 10UF 6.3V X5R 0402", Manufacturer="Murata Electronics North America", Operating Temperature="-55°C ~ 85°C", Package / Case="0402 (1005 Metric)", Ratings=-, Supplier Part Number 1=490-13238-1-ND, Temperature Coefficient=X5R, Tolerance=±20%, Voltage - Rated=6.3V, Applications="General Purpose", Category=Capacitors, ComponentLink1Description=http://www.murata.com/~/media/webrenewal/support/library/catalog/products/capacitor/mlcc/c02e.pdf, ComponentLink1URL=http://www.murata.com/~/media/webrenewal/support/library/catalog/products/capacitor/mlcc/c02e.pdf, Features="Derating Recommended", Height - Seated (Max)=-, Lead Spacing=-, Lead Style=-, Manufacturer Part Number=GRM155R60J106ME15D, Mounting Type="Surface Mount, MLCC", Packaging="Cut Tape (CT)", Part Status=Active, Pricing 1="1=0.24, 10=0.16, 100=0.0813, 500=0.0556, 1000=0.04918, 2500=0.04704, 5000=0.04277 (USD)", RoHS="RoHS Compliant", Size / Dimension="0.039\" L x 0.020\" W (1.00mm x 0.50mm)", Stock 1=183912, Supplier 1=Digi-Key, Thickness (Max)="0.026\" (0.65mm)"
C33: "CAP CER 4.7UF 6.3V 10% X5R 0603", Capacitance=4.7µF, Manufacturer="Murata Electronics North America", Operating Temperature="-55°C ~ 85°C", Package / Case="0603 (1608 Metric)", Ratings=-, Temperature Coefficient=X5R, Tolerance=±10%, Voltage - Rated=6.3V, Applications="General Purpose", Category=Capacitors, ComponentLink1Description=http://www.murata.com/~/media/webrenewal/support/library/catalog/products/capacitor/mlcc/c02e.ashx, ComponentLink1URL=http://www.murata.com/~/media/webrenewal/support/library/catalog/products/capacitor/mlcc/c02e.ashx, Features=-, Height - Seated (Max)=-, Lead Spacing=-, Lead Style=-, Manufacturer Part Number=GRM188R60J475KE19D, Mounting Type="Surface Mount, MLCC", Packaging="Cut Tape (CT)", Pricing 1="1=0.12, 10=0.08, 50=0.046, 100=0.038, 250=0.032, 500=0.0268, 1000=0.022 (USD)", RoHS="RoHS Compliant", Size / Dimension="0.063\" L x 0.031\" W (1.60mm x 0.80mm)", Stock 1=446094, Supplier 1=Digi-Key, Thickness (Max)="0.035\" (0.90mm)"
C34 C88: "CAP CER 10UF 16V 20% X6S 0603", Capacitance=10µF, Manufacturer="Murata Electronics North America", Operating Temperature="-55°C ~ 105°C", Package / Case="0603 (1608 Metric)", Ratings=-, Temperature Coefficient=X6S, Tolerance=±20%, Voltage - Rated=16V, Applications="General Purpose", Category=Capacitors, ComponentLink1Description=http://www.murata.com/products/catalog/pdf/c02e.pdf, ComponentLink1URL=http://www.murata.com/products/catalog/pdf/c02e.pdf, Features=-, Height - Seated (Max)=-, Lead Spacing=-, Lead Style=-, Manufacturer Part Number=GRM188C81C106MA73D, Mounting Type="Surface Mount, MLCC", Packaging="Cut Tape (CT)", Pricing 1="1=0.4, 10=0.349, 50=0.2118, 100=0.1744, 250=0.13952, 500=0.12708, 1000=0.11237 (USD)", RoHS="RoHS Compliant", Size / Dimension="0.063\" L x 0.031\" W (1.60mm x 0.80mm)", Stock 1=59274, Supplier 1=Digi-Key, Thickness (Max)="0.031\" (0.80mm)"
C35: "CAP CER 0.33UF 16V X7R 0603", Capacitance=0.33µF, Manufacturer="Murata Electronics North America", Operating Temperature="-55°C ~ 125°C", Package / Case="0603 (1608 Metric)", Ratings=-, Supplier Part Number 1=490-3294-1-ND, Temperature Coefficient=X7R, Tolerance=±10%, Voltage - Rated=16V, Applications="General Purpose", Category=Capacitors, ComponentLink1Description=http://www.murata.com/~/media/webrenewal/support/library/catalog/products/capacitor/mlcc/c02e.pdf, ComponentLink1URL=http://www.murata.com/~/media/webrenewal/support/library/catalog/products/capacitor/mlcc/c02e.pdf, Features=-, Height - Seated (Max)=-, Lead Spacing=-, Lead Style=-, Manufacturer Part Number=GRM188R71C334KA01D, Mounting Type="Surface Mount, MLCC", Packaging="Cut Tape (CT)", Pricing 1="1=0.13, 10=0.092, 50=0.053, 100=0.0437, 250=0.0368, 500=0.03082, 1000=0.0253 (USD)", RoHS="RoHS Compliant", Size / Dimension="0.063\" L x 0.031\" W (1.60mm x 0.80mm)", Stock 1=120176, Supplier 1=Digi-Key, Thickness (Max)="0.035\" (0.90mm)"
C36 C40: "CAP CER 10PF 50V C0G/NP0 0402", Manufacturer="Murata Electronics North America", Operating Temperature="-55°C ~ 125°C", Package / Case="0402 (1005 Metric)", Ratings=-, Supplier Part Number 1=490-6186-1-ND, Temperature Coefficient="C0G, NP0", Tolerance=±1%, Voltage - Rated=50V, Applications="General Purpose", Category=Capacitors, ComponentLink1Description=http://www.murata.com/~/media/webrenewal/support/library/catalog/products/capacitor/mlcc/c02e.pdf, ComponentLink1URL=http://www.murata.com/~/media/webrenewal/support/library/catalog/products/capacitor/mlcc/c02e.pdf, Features=-, Height - Seated (Max)=-, Lead Spacing=-, Lead Style=-, Manufacturer Part Number=GRM1555C1H100FA01D, Mounting Type="Surface Mount, MLCC", Packaging="Cut Tape (CT)", Part Status=Active, Pricing 1="1=0.1, 10=0.05, 100=0.0223, 500=0.01594, 1000=0.01252, 2500=0.01138, 5000=0.01047 (USD)", RoHS="RoHS Compliant", Size / Dimension="0.039\" L x 0.020\" W (1.00mm x 0.50mm)", Stock 1=305587, Supplier 1=Digi-Key, Thickness (Max)="0.022\" (0.55mm)"
C37 C38: "CAP CER 3.3PF 50V C0G/NP0 0402", Manufacturer="Murata Electronics North America", Operating Temperature="-55°C ~ 125°C", Package / Case="0402 (1005 Metric)", Ratings=-, Supplier Part Number 1=490-5938-1-ND, Temperature Coefficient="C0G, NP0", Tolerance=±0.25pF, Voltage - Rated=50V, Applications="General Purpose", Category=Capacitors, ComponentLink1Description=http://www.murata.com/~/media/webrenewal/support/library/catalog/products/capacitor/mlcc/c02e.pdf, ComponentLink1URL=http://www.murata.com/~/media/webrenewal/support/library/catalog/products/capacitor/mlcc/c02e.pdf, Features=-, Height - Seated (Max)=-, Lead Spacing=-, Lead Style=-, Manufacturer Part Number=GRM1555C1H3R3CA01D, Mounting Type="Surface Mount, MLCC", Packaging="Cut Tape (CT)", Part Status=Active, Pricing 1="1=0.1, 10=0.014, 100=0.0062, 500=0.00442, 1000=0.00348, 2500=0.00316, 5000=0.00291 (USD)", RoHS="RoHS Compliant", Size / Dimension="0.039\" L x 0.020\" W (1.00mm x 0.50mm)", Stock 1=124068, Supplier 1=Digi-Key, Thickness (Max)="0.022\" (0.55mm)"
C39 C64: "CAP CER 33PF 50V C0G/NP0 0402", Manufacturer="Murata Electronics North America", Operating Temperature="-55°C ~ 125°C", Package / Case="0402 (1005 Metric)", Ratings=-, Supplier Part Number 1=490-5936-1-ND, Temperature Coefficient="C0G, NP0", Tolerance=±5%, Voltage - Rated=50V, Applications="General Purpose", Category=Capacitors, ComponentLink1Description=http://www.murata.com/~/media/webrenewal/support/library/catalog/products/capacitor/mlcc/c02e.pdf, ComponentLink1URL=http://www.murata.com/~/media/webrenewal/support/library/catalog/products/capacitor/mlcc/c02e.pdf, Features=-, Height - Seated (Max)=-, Lead Spacing=-, Lead Style=-, Manufacturer Part Number=GRM1555C1H330JA01D, Mounting Type="Surface Mount, MLCC", Packaging="Cut Tape (CT)", Part Status=Active, Pricing 1="1=0.1, 10=0.015, 100=0.0067, 500=0.00478, 1000=0.00375, 2500=0.00341, 5000=0.00314 (USD)", RoHS="RoHS Compliant", Size / Dimension="0.039\" L x 0.020\" W (1.00mm x 0.50mm)", Stock 1=295196, Supplier 1=Digi-Key, Thickness (Max)="0.022\" (0.55mm)"
C41: "CAP CER 2.7PF 50V C0G/NP0 0402", Manufacturer="Murata Electronics North America", Operating Temperature="-55°C ~ 125°C", Package / Case="0402 (1005 Metric)", Ratings=-, Supplier Part Number 1=490-6229-1-ND, Temperature Coefficient="C0G, NP0", Tolerance=±0.1pF, Voltage - Rated=50V, Applications="General Purpose", Category=Capacitors, ComponentLink1Description=http://www.murata.com/~/media/webrenewal/support/library/catalog/products/capacitor/mlcc/c02e.pdf, ComponentLink1URL=http://www.murata.com/~/media/webrenewal/support/library/catalog/products/capacitor/mlcc/c02e.pdf, Features=-, Height - Seated (Max)=-, Lead Spacing=-, Lead Style=-, Manufacturer Part Number=GRM1555C1H2R7BA01D, Mounting Type="Surface Mount, MLCC", Packaging="Cut Tape (CT)", Part Status=Active, Pricing 1="1=0.1, 10=0.031, 100=0.0136, 500=0.00974, 1000=0.00765, 2500=0.00696, 5000=0.0064 (USD)", RoHS="RoHS Compliant", Size / Dimension="0.039\" L x 0.020\" W (1.00mm x 0.50mm)", Stock 1=605754, Supplier 1=Digi-Key, Thickness (Max)="0.022\" (0.55mm)"
C42: "CAP CER 5.6PF 50V C0G/NP0 0402", Manufacturer="Murata Electronics North America", Operating Temperature="-55°C ~ 125°C", Package / Case="0402 (1005 Metric)", Ratings=-, Supplier Part Number 1=490-6250-1-ND, Temperature Coefficient="C0G, NP0", Tolerance=±0.25pF, Voltage - Rated=50V, Applications="General Purpose", Category=Capacitors, ComponentLink1Description=http://www.murata.com/~/media/webrenewal/support/library/catalog/products/capacitor/mlcc/c02e.pdf, ComponentLink1URL=http://www.murata.com/~/media/webrenewal/support/library/catalog/products/capacitor/mlcc/c02e.pdf, Features=-, Height - Seated (Max)=-, Lead Spacing=-, Lead Style=-, Manufacturer Part Number=GRM1555C1H5R6CA01D, Mounting Type="Surface Mount, MLCC", Packaging="Cut Tape (CT)", Part Status=Active, Pricing 1="1=0.1, 10=0.032, 100=0.0143, 500=0.0102, 1000=0.00802, 2500=0.00729, 5000=0.0067 (USD)", RoHS="RoHS Compliant", Size / Dimension="0.039\" L x 0.020\" W (1.00mm x 0.50mm)", Stock 1=592221, Supplier 1=Digi-Key, Thickness (Max)="0.022\" (0.55mm)"
C43 C45 C50 C52 C69 C71 C75 C77: "CAP CER 1UF 6.3V X5R 0402", Manufacturer="Murata Electronics North America", Operating Temperature="-55°C ~ 85°C", Package / Case="0402 (1005 Metric)", Ratings=-, Supplier Part Number 1=490-1320-1-ND, Temperature Coefficient=X5R, Tolerance=±10%, Voltage - Rated=6.3V, Applications="General Purpose", Category=Capacitors, ComponentLink1Description=http://www.murata.com/~/media/webrenewal/support/library/catalog/products/capacitor/mlcc/c02e.pdf, ComponentLink1URL=http://www.murata.com/~/media/webrenewal/support/library/catalog/products/capacitor/mlcc/c02e.pdf, Features=-, Height - Seated (Max)=-, Lead Spacing=-, Lead Style=-, Manufacturer Part Number=GRM155R60J105KE19D, Mounting Type="Surface Mount, MLCC", Packaging="Cut Tape (CT)", Part Status=Active, Pricing 1="1=0.1, 10=0.024, 100=0.0108, 500=0.0077, 1000=0.00605, 2500=0.0055, 5000=0.00506 (USD)", RoHS="RoHS Compliant", Size / Dimension="0.039\" L x 0.020\" W (1.00mm x 0.50mm)", Stock 1=2790642, Supplier 1=Digi-Key, Thickness (Max)="0.022\" (0.55mm)"
C53 C54 C79 C80: "CAP CER 8.2PF 50V C0G/NP0 0402", Manufacturer="Murata Electronics North America", Operating Temperature="-55°C ~ 125°C", Package / Case="0402 (1005 Metric)", Ratings=-, Supplier Part Number 1=490-6256-1-ND, Temperature Coefficient="C0G, NP0", Tolerance=±0.25pF, Voltage - Rated=50V, Applications="General Purpose", Category=Capacitors, ComponentLink1Description=http://www.murata.com/~/media/webrenewal/support/library/catalog/products/capacitor/mlcc/c02e.pdf, ComponentLink1URL=http://www.murata.com/~/media/webrenewal/support/library/catalog/products/capacitor/mlcc/c02e.pdf, Features=-, Height - Seated (Max)=-, Lead Spacing=-, Lead Style=-, Manufacturer Part Number=GRM1555C1H8R2CA01D, Mounting Type="Surface Mount, MLCC", Packaging="Cut Tape (CT)", Part Status=Active, Pricing 1="1=0.1, 10=0.032, 100=0.0143, 500=0.0102, 1000=0.00802, 2500=0.00729, 5000=0.0067 (USD)", RoHS="RoHS Compliant", Size / Dimension="0.039\" L x 0.020\" W (1.00mm x 0.50mm)", Stock 1=757168, Supplier 1=Digi-Key, Thickness (Max)="0.022\" (0.55mm)"
C55 C58 C60 C61 C81: "CAP CER 56PF 50V C0G/NP0 0402", Manufacturer="Murata Electronics North America", Operating Temperature="-55°C ~ 125°C", Package / Case="0402 (1005 Metric)", Ratings=-, Supplier Part Number 1=490-1288-1-ND, Temperature Coefficient="C0G, NP0", Tolerance=±5%, Voltage - Rated=50V, Applications="General Purpose", Category=Capacitors, ComponentLink1Description=http://www.murata.com/~/media/webrenewal/support/library/catalog/products/capacitor/mlcc/c02e.ashx?la=en-us, ComponentLink1URL=http://www.murata.com/~/media/webrenewal/support/library/catalog/products/capacitor/mlcc/c02e.ashx?la=en-us, Features=-, Height - Seated (Max)=-, Lead Spacing=-, Lead Style=-, Manufacturer Part Number=GRM1555C1H560JA01D, Mounting Type="Surface Mount, MLCC", Packaging="Cut Tape (CT)", Part Status=Active, Pricing 1="1=0.1, 10=0.014, 100=0.0062, 500=0.00442, 1000=0.00348, 2500=0.00316, 5000=0.00291 (USD)", RoHS="RoHS Compliant", Size / Dimension="0.039\" L x 0.020\" W (1.00mm x 0.50mm)", Stock 1=623532, Supplier 1=Digi-Key, Thickness (Max)="0.022\" (0.55mm)"
C57 C59 C62 C63 C66 C67 C68 C83 C84 C85 C86 C87: Package / Case="0603 (1608 Metric)", Applications="General Purpose", Mounting Type="Surface Mount, MLCC"
C65: "CAP CER 27PF 50V C0G/NP0 0402", Manufacturer="Murata Electronics North America", Operating Temperature="-55°C ~ 125°C", Package / Case="0402 (1005 Metric)", Ratings=-, Supplier Part Number 1=490-11384-1-ND, Temperature Coefficient="C0G, NP0", Tolerance=±5%, Voltage - Rated=50V, Applications="General Purpose", Category=Capacitors, ComponentLink1Description=http://www.murata.com/~/media/webrenewal/support/library/catalog/products/capacitor/mlcc/c02e.pdf, ComponentLink1URL=http://www.murata.com/~/media/webrenewal/support/library/catalog/products/capacitor/mlcc/c02e.pdf, Features=-, Height - Seated (Max)=-, Lead Spacing=-, Lead Style=-, Manufacturer Part Number=GRM1555C1H270JA01J, Mounting Type="Surface Mount, MLCC", Packaging="Cut Tape (CT)", Part Status=Active, Pricing 1="1=0.1, 10=0.022, 100=0.0098, 500=0.00696, 1000=0.00548, 2500=0.00498, 5000=0.00458 (USD)", RoHS="RoHS Compliant", Size / Dimension="0.039\" L x 0.020\" W (1.00mm x 0.50mm)", Stock 1=98162, Supplier 1=Digi-Key, Thickness (Max)="0.022\" (0.55mm)"
C89 C91: "CAP CER 1UF 10V 10% X5R 0603", Capacitance=1.0µF, Manufacturer="Murata Electronics North America", Operating Temperature="-55°C ~ 85°C", Package / Case="0603 (1608 Metric)", Ratings=-, Temperature Coefficient=X5R, Tolerance=±10%, Voltage - Rated=10V, Applications="General Purpose", Category=Capacitors, ComponentLink1Description=http://search.murata.co.jp/Ceramy/image/img/A01X/G101/ENG/GRM188R61A105KA61-01.pdf, ComponentLink1URL=http://search.murata.co.jp/Ceramy/image/img/A01X/G101/ENG/GRM188R61A105KA61-01.pdf, Features=-, Height - Seated (Max)=-, Lead Spacing=-, Lead Style=-, Manufacturer Part Number=GRM188R61A105KA61D, Mounting Type="Surface Mount, MLCC", Packaging="Cut Tape (CT)", Pricing 1="1=0.1, 10=0.041, 50=0.0224, 100=0.019, 250=0.01552, 500=0.01328, 1000=0.01035 (USD)", RoHS="RoHS Compliant", Size / Dimension="0.063\" L x 0.031\" W (1.60mm x 0.80mm)", Stock 1=244919, Supplier 1=Digi-Key, Thickness (Max)="0.035\" (0.90mm)"
C90: "CAP CER 2.2UF 6.3V 10% X5R 0603", Capacitance=2.2µF, Manufacturer="Murata Electronics North America", Operating Temperature="-55°C ~ 85°C", Package / Case="0603 (1608 Metric)", Ratings=-, Temperature Coefficient=X5R, Tolerance=±10%, Voltage - Rated=6.3V, Applications="General Purpose", Category=Capacitors, ComponentLink1Description=http://search.murata.co.jp/Ceramy/image/img/A01X/G101/ENG/GRM188R60J225KE19-01.pdf, ComponentLink1URL=http://search.murata.co.jp/Ceramy/image/img/A01X/G101/ENG/GRM188R60J225KE19-01.pdf, Features=-, Height - Seated (Max)=-, Lead Spacing=-, Lead Style=-, Manufacturer Part Number=GRM188R60J225KE19D, Mounting Type="Surface Mount, MLCC", Packaging="Cut Tape (CT)", Pricing 1="1=0.17, 10=0.114, 50=0.0658, 100=0.0543, 250=0.04572, 500=0.0383, 1000=0.03143 (USD)", RoHS="RoHS Compliant", Size / Dimension="0.063\" L x 0.031\" W (1.60mm x 0.80mm)", Stock 1=155330, Supplier 1=Digi-Key, Thickness (Max)="0.035\" (0.90mm)"
C92: "CAP CER 1000PF 50V 5% NP0 0603", Capacitance=1000pF, Manufacturer="Murata Electronics North America", Operating Temperature="-55°C ~ 125°C", Package / Case="0603 (1608 Metric)", Ratings=-, Temperature Coefficient="C0G, NP0", Tolerance=±5%, Voltage - Rated=50V, Applications="General Purpose", Category=Capacitors, ComponentLink1Description=http://www.murata.com/products/catalog/pdf/c02e.pdf, ComponentLink1URL=http://www.murata.com/products/catalog/pdf/c02e.pdf, Features=-, Height - Seated (Max)=-, Lead Spacing=-, Lead Style=-, Manufacturer Part Number=GRM1885C1H102JA01D, Mounting Type="Surface Mount, MLCC", Packaging="Tape & Reel (TR)", Pricing 1="4000=0.00863, 8000=0.00788, 12000=0.0075, 28000=0.00713, 100000=0.00516 (USD)", RoHS="RoHS Compliant", Size / Dimension="0.063\" L x 0.031\" W (1.60mm x 0.80mm)", Stock 1=140000, Supplier 1=Digi-Key, Thickness (Max)="0.035\" (0.90mm)"
D1: "LED RED/GREEN/BLUE PLCC4 SMD", Color="Red, Green, Blue (RGB)", Current - Test=20mA, Luminous Flux @ Current - Test=-, Manufacturer="Cree Inc", Millicandela Rating="675mcd Red, 1055mcd Green, 337mcd Blue", Package / Case=4-PLCC, Voltage - Forward (Vf) (Typ)="2V Red, 3.2V Green, 3.2V Blue", Category=Optoelectronics, ComponentLink1Description=http://www.cree.com/~/media/Files/Cree/LED%20Components%20and%20Modules/HB/Data%20Sheets/CLV1AFKB(874).pdf, ComponentLink1URL=http://www.cree.com/~/media/Files/Cree/LED%20Components%20and%20Modules/HB/Data%20Sheets/CLV1AFKB(874).pdf, Height=2.10mm, Lens Style/Size="Round with Flat Top, 2.2mm", Lens Type="Diffused, White", Manufacturer Part Number=CLV1A-FKB-CJ1M1F1BB7R4S3, Mounting Type="Surface Mount", Packaging="Tape & Reel (TR)", Pricing 1="2000=0.354, 50000=0.329, 100000=0.307 (USD)", RoHS="RoHS Compliant", Size / Dimension="3.20mm L x 2.80mm W", Stock 1=254000, Supplier 1=Digi-Key, Viewing Angle=120°, Wavelength - Dominant="621.5nm, 530nm, 472.5nm", Wavelength - Peak="630nm, 527nm, 470nm"
FB1: "FERRITE CHIP BEAD 30 OHM SMD", Current Rating=1.5A, DC Resistance (DCR)="50 mOhm Max", Impedance @ Frequency="30 Ohm @ 100MHz", Manufacturer="TDK Corporation", Manufacturer Part Number=MMZ1608R300ATA00, Package / Case="0603 (1608 Metric)", Supplier Part Number 1=445-2181-2-ND, Category=Filters, ComponentLink1Description=http://www.tdk.co.jp/tefe02/e9412_mmz.pdf, ComponentLink1URL=http://www.tdk.co.jp/tefe02/e9412_mmz.pdf, Filter Type="Differential Mode - Single", Height (Max)="0.037\" (0.95mm)", Mounting Type="Surface Mount", Packaging="Tape & Reel (TR)", Pricing 1="4000=0.016, 8000=0.0145, 12000=0.014, 28000=0.013, 100000=0.01285 (USD)", RoHS="RoHS Compliant", Size / Dimension="0.063\" L x 0.031\" W (1.60mm x 0.80mm)", Stock 1=52000, Supplier 1=Digi-Key
FB2: "FERRITE CHIP 220 OHM 200MA 0603", Current Rating=200mA, DC Resistance (DCR)="450 mOhm Max", Impedance @ Frequency="220 Ohm @ 100MHz", Manufacturer="Murata Electronics North America", Package / Case="0603 (1608 Metric)", Category=Filters, ComponentLink1Description=http://search.murata.co.jp/Ceramy/image/img/PDF/ENG/L0110S0100BLM18B.pdf, ComponentLink1URL=http://search.murata.co.jp/Ceramy/image/img/PDF/ENG/L0110S0100BLM18B.pdf, Filter Type="Differential Mode - Single", Height (Max)="0.037\" (0.95mm)", Manufacturer Part Number=BLM18BD221SN1D, Mounting Type="Surface Mount", Packaging="Cut Tape (CT)", Pricing 1="1=0.1, 10=0.087, 50=0.0712, 100=0.0523, 250=0.038, 500=0.03484, 1000=0.0301 (USD)", RoHS="RoHS Compliant", Size / Dimension="0.063\" L x 0.031\" W (1.60mm x 0.80mm)", Stock 1=35645, Supplier 1=Digi-Key
J1 J2 J3: "TEST POINT PC MINI .040\"D YELLOW", Color=Yellow, Manufacturer="Keystone Electronics", Category="Test and Measurement", ComponentLink1Description=http://www.keyelco.com/product-pdf.cfm?p=1313, ComponentLink1URL=http://www.keyelco.com/product-pdf.cfm?p=1313, Manufacturer Part Number=5004, Material="Base, Nylon 46, UL 94V-0", Mounting Type="0.040\" (1.02mm) Hole Diameter", Packaging=Bulk, Pricing 1="1=0.34, 10=0.318, 50=0.232, 100=0.2228, 250=0.20008, 500=0.191, 1000=0.15916, 2500=0.14552, 5000=0.13643 (USD)", RoHS="RoHS Compliant", Stock 1=45761, Supplier 1=Digi-Key, Terminal="0.010\" x 0.020\" (0.25mm x 0.51mm) Phosphor Bronze Wire, Silver Plated", Type="PC Test Point, Miniature"
L1: "FIXED IND 2.2UH 790MA 97 MOHM", Current - Saturation=-, Current Rating=790mA, DC Resistance (DCR)="97 mOhm", Frequency - Self Resonant=64MHz, Frequency - Test=1MHz, Inductance=2.2µH, Manufacturer="Murata Electronics North America", Operating Temperature="-40°C ~ 85°C", Package / Case="1210 (3225 Metric)", Tolerance=±20%, Category="Inductors, Coils, Chokes", ComponentLink1Description=http://search.murata.co.jp/Ceramy/image/img/PDF/ENG/L0080S0140LQH32C_23~33.pdf, ComponentLink1URL=http://search.murata.co.jp/Ceramy/image/img/PDF/ENG/L0080S0140LQH32C_23~33.pdf, Height - Seated (Max)="0.086\" (2.20mm)", Manufacturer Part Number=LQH32CN2R2M33L, Material - Core=Ferrite, Mounting Type="Surface Mount", Packaging="Cut Tape (CT)", Pricing 1="1=0.32, 10=0.291, 25=0.2584, 50=0.2262, 100=0.21, 250=0.1938, 500=0.18412, 750=0.16796, 1000=0.14858 (USD)", Q @ Freq=-, RoHS="RoHS Compliant", Shielding=Unshielded, Size / Dimension="0.126\" L x 0.098\" W (3.20mm x 2.50mm)", Stock 1=5783, Supplier 1=Digi-Key, Supplier Device Package="1210 (3225 Metric)", Type=Wirewound
L2: "INDUCTOR 100NH 300MA 0603", Current - Saturation=-, Current Rating=300mA, DC Resistance (DCR)="900 mOhm Max", Frequency - Self Resonant=800MHz, Frequency - Test=100MHz, Inductance=100nH, Manufacturer="Murata Electronics North America", Operating Temperature="-40°C ~ 85°C", Package / Case="0603 (1608 Metric)", Q @ Freq="12 @ 100MHz", Tolerance=±5%, Category="Inductors, Coils, Chokes", ComponentLink1Description=http://search.murata.co.jp/Ceramy/image/img/PDF/ENG/L0075S0083LQG18H.pdf, ComponentLink1URL=http://search.murata.co.jp/Ceramy/image/img/PDF/ENG/L0075S0083LQG18H.pdf, Height - Seated (Max)="0.037\" (0.95mm)", Manufacturer Part Number=LQG18HNR10J00D, Material - Core=Air, Mounting Type="Surface Mount", Packaging="Cut Tape (CT)", Pricing 1="1=0.26, 10=0.24, 25=0.216, 50=0.1872, 100=0.168, 250=0.156, 500=0.144, 750=0.1368, 1000=0.1248 (USD)", RoHS="RoHS Compliant", Shielding=Unshielded, Size / Dimension="0.063\" L x 0.031\" W (1.60mm x 0.80mm)", Stock 1=8292, Supplier 1=Digi-Key, Supplier Device Package="0603 (1608 Metric)", Type=Multilayer
L3: "FIXED IND 10NH 500MA 260 MOHM", DC Resistance (DCR)="260 mOhm Max", Manufacturer="Murata Electronics North America", Operating Temperature="-55°C ~ 125°C", Package / Case="0402 (1005 Metric)", Q @ Freq="8 @ 100MHz", Ratings=-, Supplier Part Number 1=490-2623-1-ND, Tolerance=±5%, Category="Inductors, Coils, Chokes", ComponentLink1Description=http://search.murata.co.jp/Ceramy/image/img/P02/JELF243B-0010.pdf, ComponentLink1URL=http://search.murata.co.jp/Ceramy/image/img/P02/JELF243B-0010.pdf, Height - Seated (Max)="0.022\" (0.55mm)", Manufacturer Part Number=LQG15HS10NJ02D, Material - Core=-, Mounting Type="Surface Mount", Packaging="Cut Tape (CT)", Part Status=Active, Pricing 1="1=0.1, 10=0.061, 100=0.0404, 500=0.03366, 1000=0.02827, 2500=0.02423 (USD)", RoHS="RoHS Compliant", Shielding=Unshielded, Size / Dimension="0.039\" L x 0.020\" W (1.00mm x 0.50mm)", Stock 1=72900, Supplier 1=Digi-Key, Supplier Device Package="0402 (1005 Metric)", Type=Multilayer
L4: "FIXED IND 15NH 450MA 320 MOHM", DC Resistance (DCR)="320 mOhm Max", Manufacturer="Murata Electronics North America", Operating Temperature="-55°C ~ 125°C", Package / Case="0402 (1005 Metric)", Q @ Freq="8 @ 100MHz", Ratings=-, Supplier Part Number 1=490-2625-1-ND, Tolerance=±5%, Category="Inductors, Coils, Chokes", ComponentLink1Description=http://search.murata.co.jp/Ceramy/image/img/P02/JELF243B-0010.pdf, ComponentLink1URL=http://search.murata.co.jp/Ceramy/image/img/P02/JELF243B-0010.pdf, Height - Seated (Max)="0.022\" (0.55mm)", Manufacturer Part Number=LQG15HS15NJ02D, Material - Core=-, Mounting Type="Surface Mount", Packaging="Cut Tape (CT)", Part Status=Active, Pricing 1="1=0.1, 10=0.061, 100=0.0404, 500=0.03366, 1000=0.02827, 2500=0.02423 (USD)", RoHS="RoHS Compliant", Shielding=Unshielded, Size / Dimension="0.039\" L x 0.020\" W (1.00mm x 0.50mm)", Stock 1=162998, Supplier 1=Digi-Key, Supplier Device Package="0402 (1005 Metric)", Type=Multilayer
L5: "FIXED IND 12NH 400MA 410 MOHM", DC Resistance (DCR)="410 mOhm Max", Manufacturer="Murata Electronics North America", Operating Temperature="-55°C ~ 125°C", Package / Case="0402 (1005 Metric)", Q @ Freq="8 @ 100MHz", Ratings=-, Supplier Part Number 1=490-1086-1-ND, Tolerance=±5%, Category="Inductors, Coils, Chokes", ComponentLink1Description=http://search.murata.co.jp/Ceramy/image/img/P02/JELF243B-0009.pdf, ComponentLink1URL=http://search.murata.co.jp/Ceramy/image/img/P02/JELF243B-0009.pdf, Height - Seated (Max)="0.022\" (0.55mm)", Manufacturer Part Number=LQG15HN12NJ02D, Material - Core=-, Mounting Type="Surface Mount", Packaging="Cut Tape (CT)", Part Status=Active, Pricing 1="1=0.1, 10=0.061, 100=0.0404, 500=0.03366, 1000=0.02827, 2500=0.02423 (USD)", RoHS="RoHS Compliant", Shielding=Unshielded, Size / Dimension="0.039\" L x 0.020\" W (1.00mm x 0.50mm)", Stock 1=35497, Supplier 1=Digi-Key, Supplier Device Package="0402 (1005 Metric)", Type=Multilayer
L6 L10: "FIXED IND 100NH 200MA 1.25 OHM", DC Resistance (DCR)="1.25 Ohm Max", Manufacturer="Murata Electronics North America", Operating Temperature="-55°C ~ 125°C", Package / Case="0402 (1005 Metric)", Q @ Freq="8 @ 100MHz", Ratings=-, Supplier Part Number 1=490-2635-1-ND, Tolerance=±5%, Category="Inductors, Coils, Chokes", ComponentLink1Description=http://search.murata.co.jp/Ceramy/image/img/P02/JELF243B-0010.pdf, ComponentLink1URL=http://search.murata.co.jp/Ceramy/image/img/P02/JELF243B-0010.pdf, Height - Seated (Max)="0.022\" (0.55mm)", Manufacturer Part Number=LQG15HSR10J02D, Material - Core=-, Mounting Type="Surface Mount", Packaging="Cut Tape (CT)", Part Status=Active, Pricing 1="1=0.1, 10=0.071, 100=0.0476, 500=0.03968, 1000=0.03333, 2500=0.02857 (USD)", RoHS="RoHS Compliant", Shielding=Unshielded, Size / Dimension="0.039\" L x 0.020\" W (1.00mm x 0.50mm)", Stock 1=86447, Supplier 1=Digi-Key, Supplier Device Package="0402 (1005 Metric)", Type=Multilayer